# EAGLE board untitled (EAGLE 9.4.0)
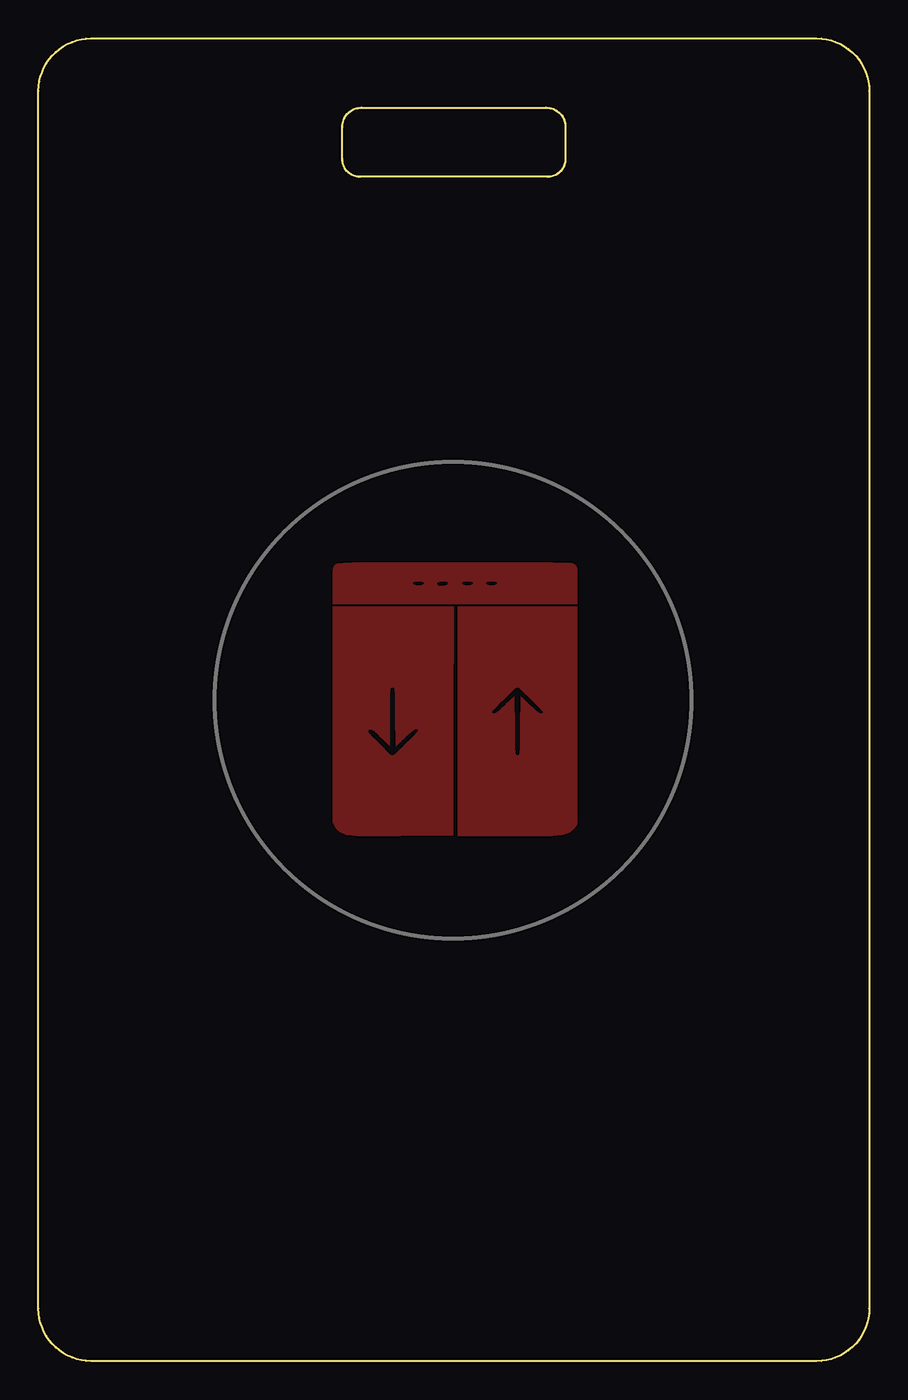
[diagram p0: board, top side]

Size 54 x 86 mm. Coordinates in mm from the lower left corner, seen from the top.
Copper layers (1*16): Top 0.035mm / dielectric 1.5mm / Bottom 0.035mm
Design rules "default": minimum track width 6mil, minimum drill 0.35mm, track to track 6mil, track to pad 6mil, pad to pad 6mil, via to via 6mil, smd to smd 6mil, copper to edge 40mil, drill to drill 6mil, minimum pad ring 10mil, minimum via ring 8mil, stop-mask expansion 4mil, vias tented up to drill 0mil, thermal gap 10mil

## Placement (x,y rotation side)
E$1  [KEYCARD]  27,43 0 top

## Library data of the parts
E$1 = shlomo

## Tracks (layer width: path | path; a pad name or v marks a point on that pad's centre or on a via)
EL.LEFT1
  pour Top (no thermals): 19.11,49.02 19.11,35.01 19.3,34.74 arc25 19.65,34.4 arc24 20.1,34.24 arc7 20.95,34.18 arc0 23.5,34.19 26.95,34.21 26.97,41.62 26.99,49.02
S$149
  pour Top: 19.11,50.42 19.11,49.27 35.03,49.27 35.03,50.45 arc1 35.03,51.2 arc7 35.01,51.49 arc21 34.96,51.65 arc27 34.85,51.77 arc33 34.61,51.85 arc1 33.43,51.87 arc1 31.47,51.89 arc0 27.06,51.89 arc0 22.07,51.89 arc1 20.41,51.87 arc2 19.52,51.84 arc42 19.28,51.73 arc23 19.19,51.59 arc15 19.14,51.41 arc6 19.12,51.1 arc1
S$239
  cutout Top: 24.42,50.52 arc-41 24.39,50.56 arc-58 24.4,50.61 arc-32 24.44,50.64 arc-14 24.54,50.66 arc-4 24.69,50.66 arc-4 24.85,50.66 arc-14 24.95,50.64 arc-32 24.99,50.61 arc-58 25,50.56 arc-41 24.97,50.52 arc-12 24.9,50.49 arc-10 24.8,50.47 arc-8 24.69,50.46 arc-8 24.59,50.47 arc-10 24.49,50.49 arc-12
S$240
  cutout Top: 26.04,50.45 arc-41 25.96,50.52 arc-79 25.98,50.59 arc-28 26.11,50.65 arc-11 26.31,50.66 arc-5 26.43,50.66 arc-17 26.52,50.64 arc-35 26.56,50.61 arc-52 26.56,50.56 arc-45 26.5,50.49 arc-15 26.35,50.44 arc-14 26.19,50.42 arc-19
S$241
  cutout Top: 27.62,50.52 arc-41 27.59,50.56 arc-58 27.6,50.61 arc-32 27.64,50.64 arc-14 27.74,50.66 arc-4 27.9,50.66 arc-4 28.05,50.66 arc-14 28.15,50.64 arc-32 28.19,50.61 arc-58 28.2,50.56 arc-41 28.17,50.52 arc-12 28.1,50.49 arc-10 28,50.47 arc-8 27.9,50.46 arc-8 27.79,50.47 arc-10 27.69,50.49 arc-12
S$242
  cutout Top: 29.18,50.52 arc-41 29.15,50.56 arc-58 29.16,50.61 arc-32 29.2,50.64 arc-14 29.3,50.66 arc-4 29.45,50.66 arc-4 29.61,50.66 arc-14 29.71,50.64 arc-32 29.75,50.61 arc-58 29.76,50.56 arc-41 29.73,50.52 arc-12 29.66,50.49 arc-10 29.56,50.47 arc-8 29.45,50.46 arc-8 29.35,50.47 arc-10 29.25,50.49 arc-12
S$243
  cutout Top: 21.55,40.82 arc-44 21.49,40.96 arc-80 21.55,41.03 arc-42 21.68,41.01 arc-11 21.91,40.83 arc-2 22.29,40.47 22.89,39.88 22.89,41.82 arc0 22.89,42.92 arc-3 22.91,43.43 arc-5 22.94,43.71 arc-81 23.01,43.77 arc-81 23.08,43.71 arc-6 23.11,43.43 arc-3 23.13,42.92 arc0 23.14,41.84 arc1 23.14,41.1 arc1 23.15,40.48 arc0 23.17,39.94 arc88 23.2,39.91 arc41 23.24,39.93 arc1 23.41,40.08 arc2 23.61,40.27 arc1 23.83,40.49 arc-3 24.17,40.82 arc-9 24.41,41 arc-26 24.55,41.06 arc-97 24.61,41 arc-45 24.57,40.89 arc0 23.85,40.18 arc0 23.13,39.47 arc-44 23.01,39.42 arc-45 22.87,39.48 arc-1 22.21,40.15 arc-1
S$244
  pour Top (no thermals): 27.24,49.02 27.24,34.17 30.65,34.17 arc0 33.12,34.18 arc6 33.98,34.23 arc20 34.45,34.37 arc24 34.81,34.66 35.03,34.92 35.03,49.02
S$245
  cutout Top: 29.6,42.14 arc-97 29.54,42.19 arc-45 29.58,42.3 arc0 30.3,43.01 arc0 31.02,43.72 arc-44 31.13,43.77 arc-41 31.19,43.75 arc-1 31.41,43.55 arc-2 31.68,43.3 arc-1 31.98,43.01 arc-1 32.27,42.72 arc-1 32.51,42.46 arc0 32.72,42.23 arc-42 32.74,42.19 arc-96 32.68,42.14 arc-27 32.54,42.19 arc-9 32.3,42.37 arc-3 31.96,42.7 arc1 31.73,42.92 arc2 31.54,43.11 arc1 31.36,43.26 arc41 31.32,43.28 arc88 31.3,43.25 arc0 31.28,42.71 arc1 31.26,42.09 arc1 31.26,41.35 arc0 31.26,40.27 arc-3 31.24,39.76 arc-6 31.21,39.48 arc-81 31.14,39.42 arc-81 31.07,39.48 arc-6 31.04,39.76 arc-3 31.02,40.27 arc0 31.01,41.35 arc1 31.01,42.09 arc1 30.99,42.71 arc0 30.98,43.25 arc88 30.95,43.28 arc41 30.91,43.26 arc1 30.74,43.11 arc2 30.54,42.92 arc1 30.32,42.7 arc-3 29.97,42.37 arc-9 29.74,42.19 arc-26